# Altium PCB ft4222.PcbDoc
Units mm, origin at the board's own origin, x right, y up, seen from the top; angles counter-clockwise.
Board outline 18 x 26 mm, 2 copper layers (Top Layer, Bottom Layer), stack 0.97 mm thick; 38 components, 42 nets, 130 pads, 24 vias.
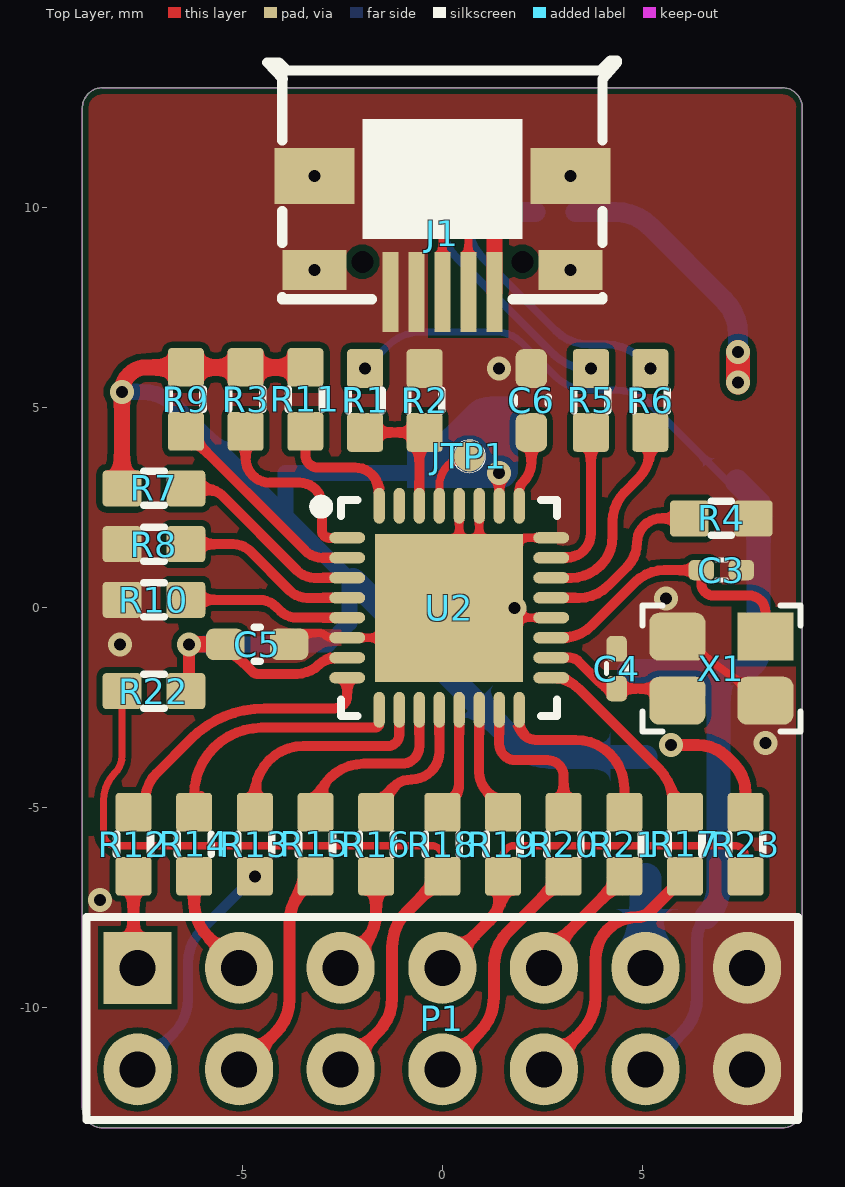
[diagram p0: Top Layer view]
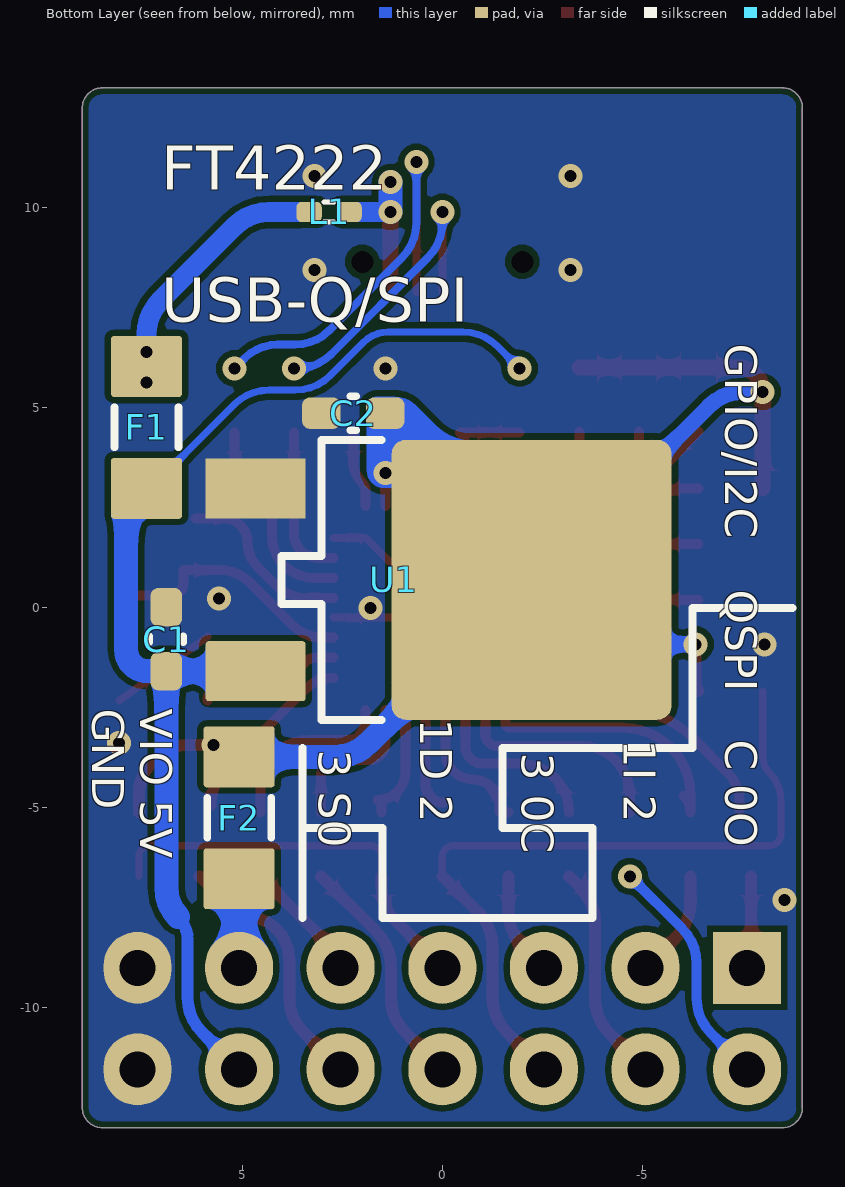
[diagram p1: Bottom Layer view, seen from below]
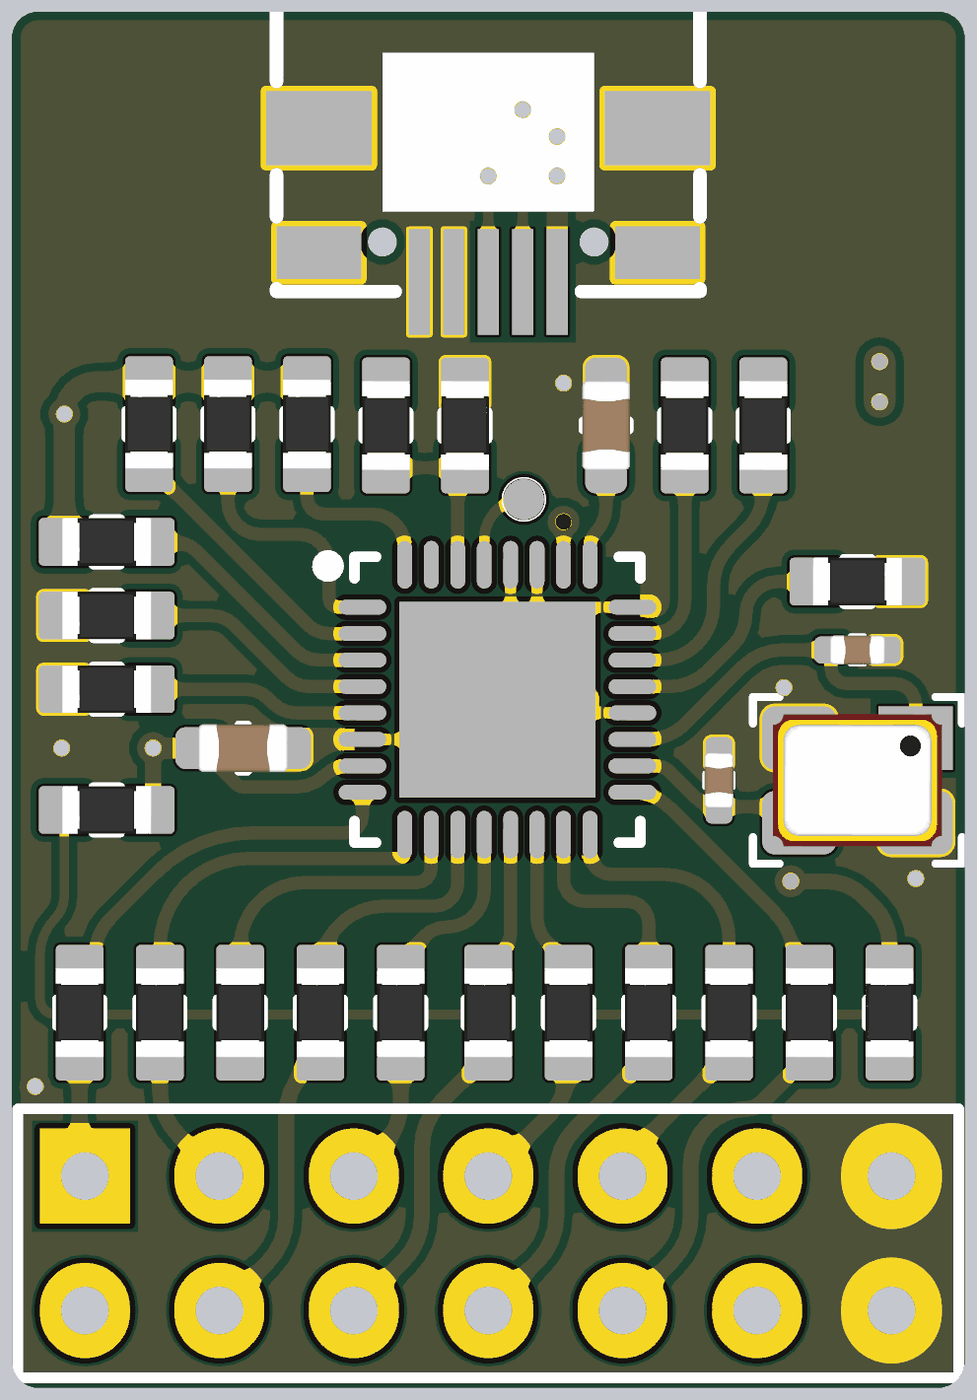
[diagram p2: 3D render of the assembled board from above, using the file's embedded part models]
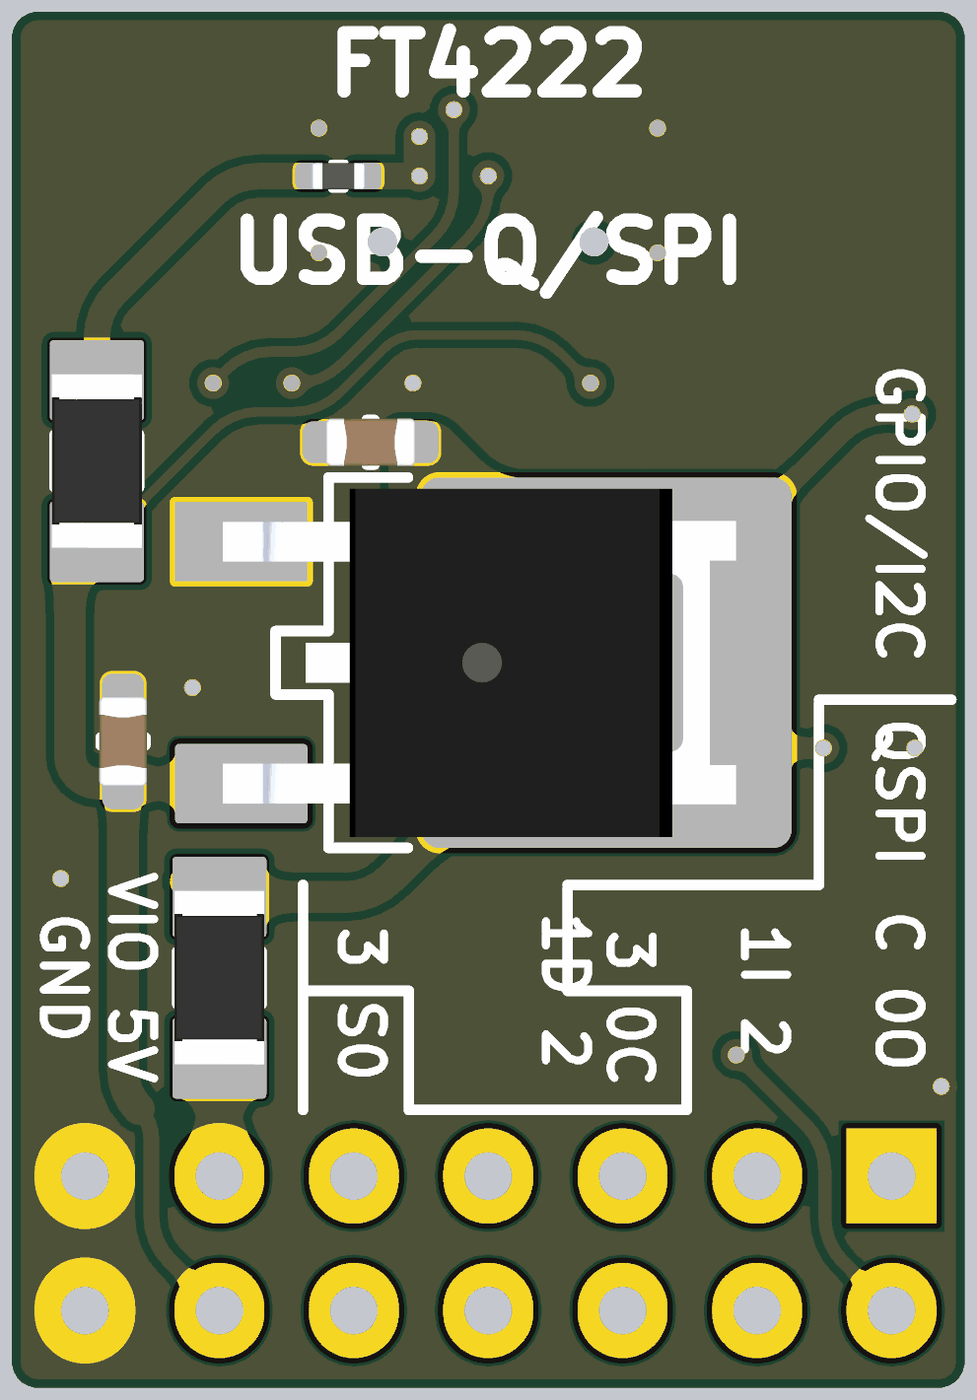
[diagram p3: 3D render of the assembled board from below, using the file's embedded part models]

## Layer stack, top to bottom
Top Solder: solder mask 0.0127, Solder Resist, Dk 3.8
Top Layer: signal copper 0.035
Dielectric: core 0.9, FR-4, Dk 4.5
Bottom Layer: signal copper 0.035
Bottom Solder: solder mask 0.0127, Solder Resist, Dk 3.8

## Board outline
-9,-12.5 -9,12.5 cw(c-8.5,12.5) -8.5,13 8.5,13 cw(c8.5,12.5) 9,12.5 9,-12.5 cw(c8.5,-12.5) 8.5,-13 -8.5,-13 cw(c-8.5,-12.5)

## Design rules (kind name [scope] priority, off if disabled: settings)
AcuteAngle [All] p1: minimum=6.00000000000000E+0001 checktracksonly=FALSE
Clearance "Clearance all" [All] p1: gap=0.127 ignorepadtopadclearanceinfootprint=FALSE except(0.15: Arc-Fill Arc-Poly Arc-Region Track-Fill Track-Poly Track-Region SMDPad-Fill SMDPad-Poly SMDPad-Region THPad-Fill THPad-Poly THPad-Region Via-Fill Via-Poly Via-Region Fill-Fill Fill-Poly Fill-Region Poly-Poly Poly-Region Region-Region)
ComponentClearance ComponentClearance_1 [HasFootprint('TP30_SMD')] p1: gap=0 collisioncheckmode=3 verticalgap=0 showdistances=FALSE
ComponentClearance [All] p2: gap=0.3 collisioncheckmode=3 verticalgap=0.254 showdistances=FALSE
DiffPairsRouting [All] p1: maxlimit=0.254 minlimit=0.127 mostfreqgap=0.127 toplayer_minwidth=0.127 toplayer_maxwidth=2 toplayer_prefwidth=0.127 bottomlayer_minwidth=0.127 bottomlayer_maxwidth=2 bottomlayer_prefwidth=0.127 maxuncoupledlength=1
HoleSize [All] p1: absolutevalues=TRUE maxlimit=6 minlimit=0.2 maxpercent=80.000 minpercent=20.000
HoleToHoleClearance HoleToHoleClearance_VIA [IsVia vs IsVia] p1: gap=0.254 allowstackedmicrovias=TRUE
HoleToHoleClearance HoleToHoleClearance_1 [IsVia vs IsThruPin] p2: gap=0.7 allowstackedmicrovias=TRUE
HoleToHoleClearance [All] p3: gap=0.5 allowstackedmicrovias=TRUE
MaxMinImpedance [All] p1: minimum=80.00 maximum=90.00
MinimumAnnularRing [not IsVia] p1: minimumring=0.15
ParallelSegment [All] p1: limit=254 gap=0.254
PlaneClearance [All] p1: clearance=0.45
PlaneConnect [All] p1: planeconnectstyle=Direct reliefexpansion=0.3 reliefentries=4 reliefconductorwidth=0.381 reliefairgap=0.178
PolygonConnect [All] p1: connectstyle=Direct reliefconductorwidth=0.381 reliefentries=4 polygonreliefangle="90 Angle" airgapwidth=0.356
ReturnPath [All] p1: _gaplimit=0
RoutingVias [All] p1: holewidth=0.3 width=0.6 viastyle="Through Hole" minholewidth=0.2 minwidth=0.4 maxholewidth=0.9 maxwidth=1.27
SilkToBoardRegionClearance [All] p1 off:
SolderMaskExpansion [All] p1: expansion=0.102 istentingtop=FALSE
UnRoutedNet [All] p1: checkbadconnections=TRUE
Width [All] p1: maxlimit=3.81 minlimit=0.15 preferedwidth=0.254
22 further rules are at their usual default settings.

## Components (designator, comment, footprint, x,y, rotation, side; value= is the part's Value field where it differs from the comment)
C1 "1uF" C0603 6.9,-0.786 r270 bottom
C2 "1uF" C0603 2.223,4.865 r180 bottom
C3 "18pF" C0402 6.977,0.941 r180 top
C4 "18pF" C0402 4.359,-1.523 r270 top
C5 "1uF" C0603 -4.631,-0.913 r180 top
C6 "1uF" C0603 2.227,5.183 r270 top
F1 "FUSE" R1206 7.396,4.51 r270 bottom
F2 "FUSE" R1206 5.08,-5.251 r90 bottom
J1 "MICROQTJ" MICRO-USB-SMD_MICROQTJ 0,9.347 r180 top
JTP1 "" TP30_SMD 0.672,3.786 r90 top
L1 "BEAD" L0402 2.831,9.895 r180 bottom
P1 "Header 7X2" HDR2X7 -7.62,-9 r180 top
R1 "10k" R0603 -1.933,5.183 r90 top
R2 "47k" R0603 -0.44,5.183 r270 top
R3 "10k" R0603 -4.917,5.208 r90 top
R4 "12k" R0603 6.977,2.234 r180 top
R5 "22R" R0603 3.712,5.183 r90 top
R6 "22R" R0603 5.198,5.183 r90 top
R7 "10k" R0603 -7.209,2.983 r180 top
R8 "10k" R0603 -7.21,1.591 r0 top
R9 "10k" R0603 -6.409,5.208 r90 top
R10 "10k" R0603 -7.21,0.199 r0 top
R11 "10k" R0603 -3.425,5.208 r90 top
R12 "22R" R0603 -7.721,-5.912 r90 top
R13 "22R" R0603 -4.687,-5.912 r90 top
R14 "22R" R0603 -6.204,-5.912 r90 top
R15 "22R" R0603 -3.171,-5.912 r90 top
R16 "22R" R0603 -1.654,-5.912 r90 top
R17 "22R" R0603 6.067,-5.912 r90 top
R18 "22R" R0603 0,-5.912 r90 top
R19 "22R" R0603 1.517,-5.912 r90 top
R20 "22R" R0603 3.033,-5.912 r90 top
R21 "22R" R0603 4.55,-5.912 r90 top
R22 "22R" R0603 -7.209,-2.083 r180 top
R23 "22R" R0603 7.583,-5.912 r270 top
U1 "LDO" "TO-252AA (DPAK)" -2.233,0.7 r0 bottom
U2 "FT4222HQ-D-T" QFN-32_L5.0-W5.0-P0.50-BL-EP3.7 0.173,0 r270 top
X1 "12MHZ" CRYSTAL_3.2x2.5mm 6.976,-1.523 r180 top

## Footprints (in the part's own frame and the unit in brackets; to place one, negate y for a bottom-side part, rotate by r counter-clockwise, add the part's x,y. Pads: shape width x height; smd on the part's side, far side on the other; paste and mask are expansions set on the pad)
C0402 [mm] "Chip Capacitor Body"
  rrect50% 0.635x0.508 smd mask+0.05: 1(-0.5,0) 2(0.5,0)
  silkscreen extent -0.13,-0.25 0.13,0.25, body extent -0.52,-0.27 0.53,0.28, height 0.55
C0603 [mil] "Chip Capacitor"
  rrect50% 38x31 smd mask+1.97: 1(-31.5,0) 2(31.5,0)
  silkscreen extent -3,-17 3,17, body extent -33,-18 33,18, height 35
CRYSTAL_3.2x2.5mm [mm]
  rect 1.4x1.2 smd mask+0.05: 1(-1.1,-0.8)
  rrect40% 1.4x1.2 smd mask+0.05: 2(-1.1,0.8) 3(1.1,0.8) 4(1.1,-0.8)
  silkscreen extent -1.97,-1.57 1.97,1.57, body extent -1.6,-1.25 1.6,1.25, height 0.82
HDR2X7 [mm] "Connector; Header; 7x2 Position"
  rect 1.7x1.8 hole 0.9: 1(0,0)
  oval 1.7x1.8 hole 0.9: 2(0,2.54) 3(-2.54,0) 4(-2.54,2.54) 5(-5.08,0) 6(-5.08,2.54) 7(-7.62,0) 8(-7.62,2.54) 9(-10.16,0) 10(-10.16,2.54) 11(-12.7,0) 12(-12.7,2.54) 13(-15.24,0) 14(-15.24,2.54)
  silkscreen extent -16.51,-1.27 1.27,3.81
L0402 [mm] "Chip Inductor"
  rrect50% 0.635x0.508 smd mask+0.05: 1(-0.5,0) 2(0.5,0)
  silkscreen extent -0.12,-0.25 0.13,0.25, body extent -0.5,-0.25 0.5,0.25, height 0.5
MICRO-USB-SMD_MICROQTJ [mm]
  rect 0.4x2 smd mask+0.05: 1(-1.3,1.452) 2(-0.65,1.452) 3(0,1.452) 4(0.65,1.452) 5(1.3,1.452)
  rect 1.6x1 smd: 6(-3.2,0.902) 9(3.2,0.902)
  rect 2x1.4 smd: 7(-3.2,-1.452) 8(3.2,-1.452)
  round 0 hole 0.55 unplated: ""(-2,0.698) ""(2,0.698)
  silkscreen extent -4.37,-4.34 4.38,1.63
QFN-32_L5.0-W5.0-P0.50-BL-EP3.7 [mm]
  oval 0.28x0.9 smd: 1(-1.75,-2.55) 2(-1.25,-2.55) 3(-0.749,-2.55) 4(-0.249,-2.55) 5(0.249,-2.55) 6(0.749,-2.55) 7(1.25,-2.55) 8(1.75,-2.55) 17(1.75,2.55) 18(1.25,2.55) 19(0.749,2.55) 20(0.249,2.55) 21(-0.249,2.55) 22(-0.749,2.55) 23(-1.25,2.55) 24(-1.75,2.55)
  oval 0.9x0.28 smd: 9(2.55,-1.75) 10(2.55,-1.25) 11(2.55,-0.749) 12(2.55,-0.249) 13(2.55,0.249) 14(2.55,0.749) 15(2.55,1.25) 16(2.55,1.75) 25(-2.55,1.75) 26(-2.55,1.25) 27(-2.55,0.749) 28(-2.55,0.249) 29(-2.55,-0.249) 30(-2.55,-0.749) 31(-2.55,-1.25) 32(-2.55,-1.75)
  rect 3.7x3.7 smd: 33(0,0)
  silkscreen extent -2.7,-3.35 2.7,2.7
R0603 [mil] "Chip Resistor; Body 1.6 x 0.8 mm (LxW typ)"
  rrect20% 38x35.43 smd mask+1.97: 1(-31.5,0) 2(31.5,0)
  silkscreen extent -10,-17 10,17, body extent -33,-18 33,18, height 22
R1206 [mil] "Chip Resistor; Body 1.6 x 0.8 mm (LxW typ)"
  rrect10% 60x70 smd mask+1.97: 1(-60,0) 2(60,0)
  silkscreen extent -20,-31 20,31, body extent -65,-33 65,33, height 26
"TO-252AA (DPAK)" [mm] "D-PAK"
  rect 2.5x1.5 smd: 1(6.9,-2.286)
  rrect10% 7x7 smd: 2(0,0)
  rrect10% 2.5x1.5 smd: 3(6.9,2.286)
  silkscreen extent 3.75,-3.5 6.25,3.5, body extent -2.45,-3.29 7.25,3.29, height 2.3
TP30_SMD [mil] "TP30_SMD"
  round 30 smd: 1(0,0)
  silkscreen extent -16,-16 16,16

## Part data
C1 C2 C5 C6: library part CAP, "1uF 25V X7R 0603", LCSC part number=C59302, P/N=0603B105K250NT
C3 C4: library part CAP, "18pF 50V 0402", LCSC part number=C33149, P/N=GRM1555C1H180JA01D
F1 F2: library part RES, P/N=RC0603FR-0710KL
J1: BOM_JLCPCB Part Class="Extended Part", BOM_Manufacturer="SHOU HAN", BOM_Manufacturer Part=MicroQTJ, BOM_Supplier=LCSC, BOM_Supplier Part=C404968, Contributor=LCSC, spicePre=U, spiceSymbolName=MICROQTJ
JTP1: library part TP_Dup1, PCB Footprint=TP30_SMD
L1: library part BLM18AG601SN1D, "INDUCTOR FERRITE BEAD 200mA 1 650mΩ 0402", LCSC part number=C92615, P/N=CBG100505U600T
P1: "Header, 7-Pin, Dual row", LatestRevisionDate=17-Jul-2002, LatestRevisionNote="Re-released for DXP Platform.", Publisher="Altium Limited"
R1 R3 R7 R8 R9 R10 R11: library part RES, "10k 0603", P/N=RC0603FR-0710KL
R2: library part RES, "47k 0603", P/N=RC0603FR-0747KL
R4: library part RES, "12k 0603", LCSC part number=C114659, P/N=RC0603FR-0712KL
R5 R6 R12 R13 R14 R15 R16 R17 R18 R19 R20 R21 R22 R23: library part RES, "22R 5% 0603", P/N=RC0603FR-0722RL
U1: library part NCP51460SN33T1G
U2: BOM_JLCPCB Part Class="Extended Part", BOM_Manufacturer=FTDI(飞特帝亚), BOM_Manufacturer Part=FT4222HQ-D-T, BOM_Supplier=LCSC, BOM_Supplier Part=C910592, Contributor=lcsc, link=https://atta.szlcsc.comnull, spicePre=U, spiceSymbolName=FT4222HQ-D-T
X1: library part "CRYSTAL 12MHZ 3.20mm x 2.50mm", "CRYSTAL 12MHZ 10PF SMD", LCSC part number=C70565, P/N=X322512MOB4SI

## Via types
v1: diameter 0.6, hole 0.3, Top Layer to Bottom Layer, tented both sides, 24 vias

## Nets (pads, with @x,y where several pads share a name; then routed paths per layer and width w, separated by ;. In a path a pad name is that pad's centre, name@x,y a point inside that pad or via, vN(x,y) a via of type N, cw(c..) or ccw(c..) an arc to the next point about the centre after c; other vN are vias at no path point)
ESPI_CLK: P1.1 R12.1 | length 2.3
  Top Layer w0.3: R12.1 -7.721,-8.757 ccw(c-7.377,-8.757) P1.1
ESPI_IO_0: P1.2 R13.1 | length 5.9
  Bottom Layer w0.25: P1.2 -6.715,-10.635 ccw(c-7.578,-9.773) -6.358,-9.773 -6.358,-8.888 cw(c-5.139,-8.888) -6.001,-8.026 v1(-4.687,-6.712)
ESPI_IO_1: P1.3 R14.1 | length 2.7
  Top Layer w0.3: R14.1 -6.204,-7.371 ccw(c-4.985,-7.371) -5.847,-8.233 P1.3
ESPI_IO_2: P1.4 R15.1 | length 5.5
  Top Layer w0.3: P1.4 -4.175,-10.635 ccw(c-5.038,-9.773) -3.818,-9.773 -3.818,-7.865 cw(c-2.599,-7.865) -3.461,-7.003 R15.1
ESPI_IO_3: P1.5 R16.1 | length 2.6
  Top Layer w0.3: P1.5 -2.011,-8.471 ccw(c-2.873,-7.609) -1.654,-7.609 R16.1
FT_VPP: JTP1.1 U2.29 | length 1.7
  Top Layer w0.2: U2.29 -0.076,3.038 cw(c0.672,3.038) JTP1.1
GND: C1.1 C2.1 C3.1 C4.1 C5.1 C6.1 J1.4 J1.5 J1.6 J1.7 J1.8 J1.9 P1.13 P1.14 R2.1 R4.1 R8.1 R10.1 U1.1 U2.6 U2.20 U2.24 U2.27 U2.28 U2.33 X1.2 X1.4 | length 17.3
  Top Layer w0.2: C5.1 cw(c-3.555,-0.913) -3.555,-0.637 -3.042,-0.637 cw(c-3.042,-0.787) -2.935,-0.681 ccw(c-2.77,-0.516) -2.77,-0.749 U2.6 -0.576,-0.749 U2.33 ; U2.28 U2.33@0.422,0.249 ; U2.27 U2.33@0.922,0.749 ; U2.20 0.422,-0.249 U2.33 ; U2.24 1.923,1.75 U2.33@0.922,0.749 ; X1.4 X1.2 ; U2.33 U2.33@0.422,0.249 ; U2.33@0.422,0.249 U2.33@0.922,0.749
  other v1: -8.559,-7.307 8.077,-3.378 -8.06,-0.913 1.8,0 5.588,0.229 1.423,5.983 -3.2,8.445 3.2,8.445 -3.2,10.799 3.2,10.799
GPIO0: P1.6 R18.1 R22.2 | length 18.8
  Top Layer w0.18: R22.2 -8.01,-3.709 cw(c-8.608,-3.709) -8.185,-4.132 ccw(c-7.497,-4.821) -8.47,-4.821 -8.47,-5.654 ccw(c-8.175,-5.654) -8.175,-5.948 -0.268,-5.948 cw(c-0.268,-6.216) 0,-6.216 R18.1
  Top Layer w0.3: P1.6 -1.61,-10.61 ccw(c-2.472,-9.748) -1.253,-9.748 -1.253,-8.47 cw(c-0.034,-8.47) -0.896,-7.608 R18.1
GPIO1: P1.7 R19.1 R23.2 | length 10.2
  Top Layer w0.18: R19.1 1.517,-6.216 cw(c1.784,-6.216) 1.784,-5.948 7.316,-5.948 cw(c7.316,-6.216) 7.583,-6.216 R23.2
  Top Layer w0.3: P1.7 1.159,-7.841 ccw(c0.297,-6.978) 1.517,-6.978 R19.1
GPIO2: P1.8 R20.1 | length 6
  Top Layer w0.3: P1.8 0.93,-10.61 ccw(c0.068,-9.748) 1.287,-9.748 1.287,-8.964 cw(c2.506,-8.964) 1.644,-8.102 R20.1
GPIO3: P1.9 R21.1 | length 3.1
  Top Layer w0.3: P1.9 cw(c3.21,-9) 2.736,-8.526 R21.1
NetC3_2: C3.2 U2.19 X1.1 | length 7.3
  Top Layer w0.25: U2.19 3.001,-0.749 ccw(c3.001,0.292) 3.737,-0.444 4.817,0.636 cw(c5.554,-0.1) 5.554,0.941 C3.2 6.477,0.603 ccw(c6.773,0.603) 6.773,0.306 7.67,0.306 cw(c7.67,-0.1) 8.076,-0.1 X1.1
NetC4_2: C4.2 U2.18 X1.3 | length 3.6
  Top Layer w0.25: U2.18 3.188,-1.25 cw(c3.188,-1.559) 3.407,-1.34 3.899,-1.832 ccw(c4.359,-1.372) C4.2 5.576,-2.023 cw(c5.576,-2.323) X1.3
NetC6_2: C6.2 U2.25 | length 1.9
  Top Layer w0.25: U2.25 1.923,2.913 cw(c2.255,2.913) 2.02,3.147 ccw(c1.522,3.646) 2.227,3.646 C6.2
NetF1_1: F1.1 L1.1 | length 6.7
  Top Layer w0.6: v1(7.396,5.627) v1(7.396,6.389)
  Bottom Layer w0.5: L1.1 4.332,9.895 cw(c4.332,8.676) 5.194,9.538 7.039,7.693 cw(c6.177,6.831) 7.396,6.831 v1(7.396,6.389)
NetF2_1: F2.1 P1.11 | length 2.2
  Bottom Layer w0.8: P1.11 F2.1
NetJ1_1: J1.1 L1.2 | length 4.5
  Top Layer w0.4: J1.1 v1(1.3,9.895) v1(1.3,10.641)
  Bottom Layer w0.5: v1(1.3,9.895) L1.2
  Bottom Layer w0.6: v1(1.3,9.895) v1(1.3,10.641)
NetR1_1: R1.1 R2.2 U2.30 | length 3.4
  Top Layer w0.25: R1.1@-1.927,4.383 R2.2 ccw(c-0.112,4.054) -0.576,4.054 U2.30
NetR3_1: R3.1 U2.1 | length 4.6
  Top Layer w0.25: R3.1 -4.917,3.735 ccw(c-4.308,3.735) -4.308,3.125 -3.565,3.125 cw(c-3.565,2.57) -3.01,2.57 -3.01,1.926 ccw(c-2.834,1.926) -2.834,1.75 U2.1
NetR4_2: R4.2 U2.21 | length 4.5
  Top Layer w0.25: U2.21 3.415,0.249 ccw(c3.415,1.29) 4.151,0.554 4.617,1.02 ccw(c4.01,1.627) 4.868,1.627 cw(c5.475,1.627) 5.475,2.234 R4.2
NetR5_1: R5.1 U2.23 | length 3.9
  Top Layer w0.25: U2.23 3.103,1.25 ccw(c3.103,1.859) 3.712,1.859 R5.1
NetR6_1: R6.1 U2.22 | length 5
  Top Layer w0.25: U2.22 3.217,0.749 ccw(c3.217,1.791) 4.259,1.791 4.259,2.161 cw(c5.3,2.161) 4.564,2.897 4.893,3.227 ccw(c4.157,3.963) 5.198,3.963 R6.1
NetR7_1: R7.1 U2.3 | length 4.9
  Top Layer w0.25: R7.1 -5.936,2.983 cw(c-5.936,2.374) -5.505,2.805 -3.628,0.928 ccw(c-3.197,1.359) -3.197,0.749 U2.3
NetR8_2: R8.2 U2.4 | length 4.5
  Top Layer w0.25: R8.2 -5.229,1.591 cw(c-5.229,0.982) -4.798,1.413 -3.813,0.428 ccw(c-3.382,0.859) -3.382,0.249 U2.4
NetR9_1: R9.1 U2.2 | length 5.3
  Top Layer w0.25: R9.1 -3.43,1.428 ccw(c-2.999,1.859) -2.999,1.25 U2.2
NetR10_2: R10.2 U2.5 | length 4.2
  Top Layer w0.25: R10.2 -4.583,0.199 cw(c-4.583,-0.41) -4.152,0.021 -4.061,-0.07 ccw(c-3.63,0.361) -3.63,-0.249 U2.5
NetR11_1: R11.1 U2.32 | length 3.3
  Top Layer w0.25: R11.1 -3.425,3.824 ccw(c-3.107,3.824) -3.107,3.506 -2.187,3.506 cw(c-2.187,2.897) -1.577,2.897 U2.32
NetR12_2: R12.2 U2.8 | length 7
  Top Layer w0.25: R12.2@-7.434,-5.07 -7.434,-4.846 cw(c-6.418,-4.846) -7.136,-4.128 -6.284,-3.275 cw(c-4.447,-5.112) -4.447,-2.515 -2.701,-2.515 ccw(c-2.701,-2.191) -2.377,-2.191 U2.8
NetR13_2: R13.2 U2.10 | length 5.5
  Top Layer w0.25: R13.2 -4.687,-4.674 cw(c-3.468,-4.674) -3.468,-3.454 -1.355,-3.454 ccw(c-1.355,-3.177) -1.077,-3.177 U2.10
NetR14_2: R14.2 U2.9 | length 6.9
  Top Layer w0.25: R14.2@-6.034,-4.701 ccw(c-5.623,-5.112) R14.2 -6.204,-4.686 cw(c-4.517,-4.686) -4.517,-2.999 -1.689,-2.999 ccw(c-1.689,-2.887) -1.577,-2.887 U2.9
NetR15_2: R15.2 U2.11 | length 4.4
  Top Layer w0.25: R15.2 cw(c-1.957,-5.112) -1.957,-3.898 -1.01,-3.898 ccw(c-1.01,-3.464) -0.576,-3.464 U2.11
NetR16_2: R16.2 U2.12 | length 3.5
  Top Layer w0.25: R16.2 -1.462,-5.112 ccw(c-1.462,-5.073) -1.423,-5.073 -1.423,-4.945 cw(c-0.77,-4.945) -0.77,-4.293 ccw(c-0.77,-3.598) -0.076,-3.598 U2.12
NetR17_2: R17.2 U2.17 | length 4.6
  Top Layer w0.25: U2.17 cw(c2.723,-2.756) 3.434,-2.045 5.416,-4.026 cw(c4.554,-4.888) 5.773,-4.888 R17.2@5.773,-4.944
NetR18_2: R18.2 U2.13 | length 2.6
  Top Layer w0.25: R18.2@-0.027,-4.871 ccw(c-0.027,-4.422) 0.422,-4.422 U2.13
NetR19_2: R19.2 U2.14 | length 3
  Top Layer w0.25: U2.14 0.922,-4.104 ccw(c1.625,-4.104) R19.2@1.517,-4.798 ; R19.2 R19.2@1.517,-4.798 ; R19.2@1.625,-4.807 cw(c1.625,-4.104) R19.2@1.517,-4.798
NetR20_2: R20.2 U2.15 | length 3.8
  Top Layer w0.25: U2.15 1.423,-3.402 ccw(c1.829,-3.402) 1.829,-3.809 2.627,-3.809 cw(c2.627,-4.215) 3.033,-4.215 R20.2
NetR21_2: R21.2 U2.16 | length 4.5
  Top Layer w0.25: U2.16 1.923,-2.894 ccw(c2.329,-2.894) 2.329,-3.301 3.331,-3.301 cw(c3.331,-4.52) 4.55,-4.52 R21.2
SS0: P1.10 R17.1 | length 6.5
  Top Layer w0.3: P1.10 3.47,-10.61 ccw(c2.608,-9.748) 3.827,-9.748 3.827,-8.793 cw(c4.89,-8.793) 4.89,-7.73 ccw(c4.89,-7.346) 5.161,-7.618 R17.1
USB_HOST_DM: J1.2 R6.2 | length 11
  Top Layer w0.2: J1.2 v1(0.65,11.149)
  Bottom Layer w0.2: v1(0.65,11.149) 0.65,9.614 ccw(c1.869,9.614) 1.007,8.752 2.824,6.936 ccw(c3.686,7.798) 3.686,6.579 4.115,6.579 cw(c4.115,5.401) 4.948,6.234 v1(5.198,5.983)
USB_HOST_DP: J1.3 R5.2 | length 7.7
  Top Layer w0.2: J1.3 v1(0,9.895)
  Bottom Layer w0.2: v1(0,9.895) 0,9.621 ccw(c1.219,9.621) 0.357,8.759 2.776,6.34 ccw(c3.638,7.202) 3.638,5.983 v1(3.712,5.983)
VBUS: C1.2 F1.2 P1.12 R1.2 U1.3 | length 29.7
  Bottom Layer w0.18: v1(-1.933,5.983) -1.378,6.538 cw(c-0.516,5.676) -0.516,6.895 1.354,6.895 cw(c1.354,6.029) 1.966,6.641 2.808,5.799 ccw(c3.67,6.662) 3.67,5.442 4.336,5.442 cw(c4.336,4.223) 5.198,5.085 7.248,3.036 ccw(c7.368,3.157) 7.368,2.986 F1.2
  Bottom Layer w0.3: P1.12 6.01,-10.61 ccw(c5.148,-9.748) 6.367,-9.748 6.367,-8.298 cw(c7.17,-8.298) 6.602,-7.73
  Bottom Layer w0.6: U1.3 C1.2 ; 6.602,-7.73 ccw(c5.882,-7.01) 6.9,-7.01 C1.2 ; F1.2@7.368,3.157 7.905,2.62 7.905,-1.048 cw(c7.367,-1.048) 7.367,-1.586 C1.2
VIO: C2.2 C5.2 F2.2 R3.2 R7.2 R9.2 R11.2 R22.1 R23.1 U1.2 U2.7 U2.26 | length 45.1
  Top Layer w0.25: C5.2 -4.742,-1.603 ccw(c-4.628,-1.489) -4.628,-1.65 -3.634,-1.65 ccw(c-3.634,-0.869) -3.082,-1.421 cw(c-2.668,-1.836) -2.668,-1.25 U2.7 ; U2.26 v1(1.423,3.363)
  Top Layer w0.3: R22.1 ccw(c-6.593,-1.899) -6.333,-1.899 v1(-6.333,-0.913) ; v1(5.715,-3.429) 6.386,-3.429 cw(c6.386,-4.445) 7.105,-3.727 7.286,-3.907 cw(c6.567,-4.626) 7.583,-4.626 R23.1
  Top Layer w0.4: R7.2 v1(-8.01,5.399) cw(c-7.4,5.399) -7.4,6.008 R9.2 R3.2 R11.2 ; v1(-6.333,-0.913) C5.2
  Bottom Layer w0.4: v1(-8.01,5.399) -7.529,5.399 cw(c-7.529,4.179) -6.667,5.042 U1.2@-3.916,2.291 ; v1(-6.333,-0.913) -2.858,-0.913 -2.325,-0.38 -2.325,0.7 U1.2@-3.916,2.291 ; U1.2@-0.002,3.363 -3.916,3.363 U1.2@-3.916,2.291
  Bottom Layer w0.6: U1.2 1.837,-3.37 ccw(c2.699,-2.508) 2.699,-3.727 F2.2 ; U1.2@-0.002,3.363 v1(1.423,3.363)
pads on no net: J1. U2.31

## Polygon pours and split planes (outlines as drawn)
GND on Top Layer "NONET_L02_P-001" (solid, remove dead copper, pour order 0): -9,13 -9,-13 9,-13 9,13
GND on Bottom Layer "NONET_L02_P-001" (solid, remove dead copper, pour order 1): 9,13 9,-13 -9,-13 -9,13

## Keep-outs
Keep-Out Layer:
  the board outline again, w0

## Other copper
Top Layer:
  pour cut-out: -2.527,-2.7 2.873,-2.7 2.873,2.7 -2.527,2.7
Bottom Layer:
  region net VIO: 0.382,2.994 1.453,2.994 ccw(c1.453,3.427) 1.886,3.427 1.886,5.032 ccw(c1.644,5.032) 1.644,5.274 1.182,5.274 ccw(c1.182,4.542) 0.664,5.06 0.15,4.546 cw(c-0.712,5.408) -0.712,4.189 -0.882,4.189 -0.882,2.996 0.388,2.996

## Silkscreen, mask and mechanical layers (free items; w line width, h text height)
Top Overlay:
  rectangle: -2,9.225 2,12.225
Bottom Overlay:
  lines w0.2: -8.75,0 -6.25,0 -6.25,-3.5 -1.5,-3.5 -1.5,-5.5 -3.75,-5.5 -3.75,-7.75 1.5,-7.75 1.5,-5.5 3.5,-5.5 ; 3.5,-7.75 3.5,-5.5 ; 3.5,-3.5 3.5,-5.5
  text "FT4222 /  / USB-Q/SPI" at 7.031,7.153 h1.1
  text "GPIO/I2C" at -7.07,6.602 h0.8 r90
  text "QSPI" at -7.07,0.45 h0.8 r90
  text "VIO 5V / GND" at 8.75,-2.525 h0.8 r90
  text "1D 2" at 0.55,-2.775 h0.8 r90
  text "C 0O" at -7.07,-3.3 h0.8 r90
  text "1I 2" at -4.53,-3.3 h0.8 r90
  text "3 S0" at 3.09,-3.55 h0.8 r90
  text "3 0C" at -1.99,-3.63 h0.8 r90